# EAGLE board Terminierung_RS485-003 (EAGLE 7.6.0)
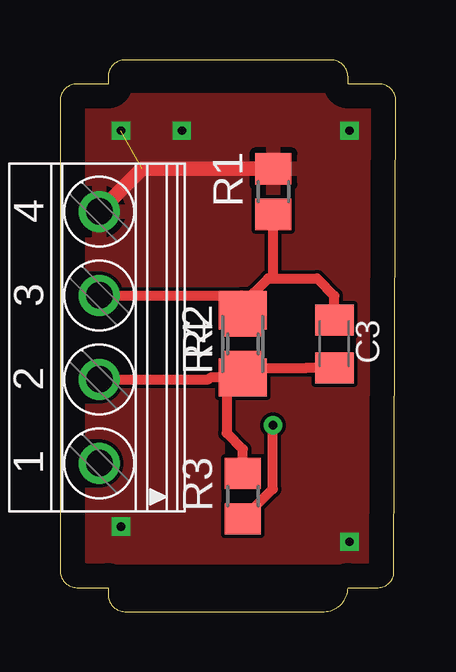
[diagram p0: board, top side]
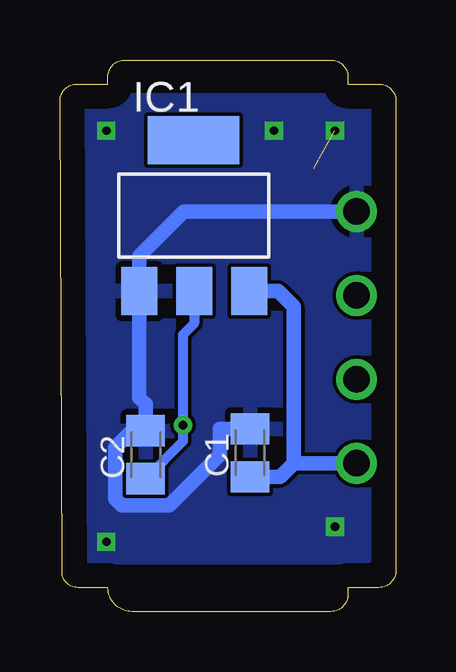
[diagram p1: board, bottom side, seen from below]

Size 14 x 23 mm. Coordinates in mm from the lower left corner, seen from the top.
Outline: 0,21.29 0,1.71 arc90 0.71,1 2,1 2,0.71 arc90 2.71,0 11,0 arc90 12,1 13.27,1 arc90 13.91,1.64 14,21.29 arc90 13.29,22 12,22 12,22.29 arc90 11.29,23 2.71,23 arc90 2,22.29 2,22 0.71,22 arc90 0,21.29
Copper layers (1*16): Top 0.035mm / dielectric 1.5mm / Bottom 0.035mm
Design rules "default": minimum track width 6mil, minimum drill 0.35mm, track to track 6mil, track to pad 6mil, pad to pad 6mil, via to via 6mil, smd to smd 6mil, copper to edge 40mil, drill to drill 6mil, minimum pad ring 10mil, minimum via ring 8mil, stop-mask expansion 4mil, vias tented up to drill 0mil, thermal gap 10mil
Net classes: 0 default: width 0.406 mm; 1 Power: width 0.61 mm

## Footprints (pad centres in the part's own frame; a part is rotated, then mirrored left to right if it is on the bottom)
C0805K = smd 1.3 x 1.6: 1 -1,0; 2 1,0
SOT223 = smd 1.499 x 2.007: 1 -2.261,-3.15; 2 0.025,-3.15; 3 2.311,-3.15 | smd 3.81 x 2.007: 4 0,3.15
R0805 = smd 1.3 x 1.5: 1 -0.95,0; 2 0.95,0
M1206 = smd 1.6 x 2: 1 -1.4,0; 2 1.4,0
1751264 = drill 1.1 pad 1.7: 1 -5.25,-0.1; 2 -1.75,-0.1; 3 1.75,-0.1; 4 5.25,-0.1

## Placement (x,y rotation side)
C1  10uF  [C0805K]  6.08,6.62 90 bottom
C2  100uF  [C0805K]  10.43,6.54 90 bottom
C3  22pF  [C0805K]  11.43,11.16 270 top
IC1  REG1117  [SOT223]  8.43,16.51 0 bottom
R1  330  [R0805]  8.89,17.51 90 top
R2  150  [R0805]  7.62,11.16 90 top
R3  330  [R0805]  7.62,4.81 90 top
R4  [M1206]  7.62,11.16 90 top
X1  1751264  [1751264]  1.54,11.43 90 top

## Library data of the parts
C1-C3 R1-R4 = resistor
IC1 = burr-brown; MPN: REG1117; OC_FARNELL: 1097566; OC_NEWARK: 14P6981
X1 = con-phoenix-350; MF: VIN; MPN: 1751264; OC_FARNELL: unknown; OC_NEWARK: 10R0934

## Nets
GND [Power]: C1.2 C2.2 IC1.1 R1.2 X1.4
N$2: C2.1 IC1.2 R3.1
N$3: C3.1 R1.1 R2.2 R4.2 X1.3
N$4: C3.2 R2.1 R3.2 R4.1 X1.2
VCC [Power]: C1.1 IC1.3 X1.1

## Tracks (layer width: path | path; a pad name or v marks a point on that pad's centre or on a via)
GND  (via drill 0.35 pad 0.76)  (1 unrouted)
  Top 0.61: R1.2 3.42,18.46 X1.4
  Bottom 0.61: X1.4 8.83,16.68 10.69,14.82 IC1.1 10.69,8.91 10.43,8.65 10.43,8.09 | C1.2 7.34,7.62 7.34,6.53 9.44,4.43 11.42,4.43 11.69,4.7 11.69,6.84 10.43,8.09 | C2.2 10.43,8.09
  other vias: 2.54,20.05 5.08,20.05 2.54,3.54 12.06,20.05 12.06,2.91
  pour Top: 1.27,2.27 1.27,21.32 12.7,21.32 12.7,2.27
  pour Bottom: 1.27,2.27 1.27,21.32 12.7,21.32 12.7,2.27
N$2  (via drill 0.35 pad 0.76)
  Top 0.406: R3.1 8.87,5.11 v8.87,7.77
  Bottom 0.406: IC1.2 8.4,12 8.87,11.53 v8.87,7.77 8.87,7.1 C2.1
N$3
  Top 0.406: 8.89,13.89 10.71,13.89 11.43,13.17 C3.1 | 7.62,12.84 8.67,13.89 8.89,13.89 | 8.89,13.89 R1.1 | 7.62,12.84 7.62,13.12 7.56,13.18 X1.3 | 7.62,12.84 R4.2 R2.2
N$4
  Top 0.406: R3.2 7.62,6.77 6.94,7.44 6.94,9.76 | 6.94,9.76 6.26,9.76 6.18,9.68 X1.2 | 6.94,9.76 R4.1 7.62,10.16 | 7.62,10.16 R2.1 | 7.62,10.16 10.27,10.16 C3.2
VCC
  Bottom 0.61: 4.26,6.18 4.82,5.62 C1.1 | X1.1 4.26,6.18 | 4.26,6.18 4.26,12.71 4.91,13.36 IC1.3